# Altium PCB SetoDiff.PcbDoc
Units mm, origin at the board's own origin, x right, y up, seen from the top; angles counter-clockwise.
Board outline 40 x 53 mm, 2 copper layers (Top Layer, Bottom Layer); 42 components, 25 nets, 110 pads, 0 vias.
Unrouted connection lines stored in the file: 80.
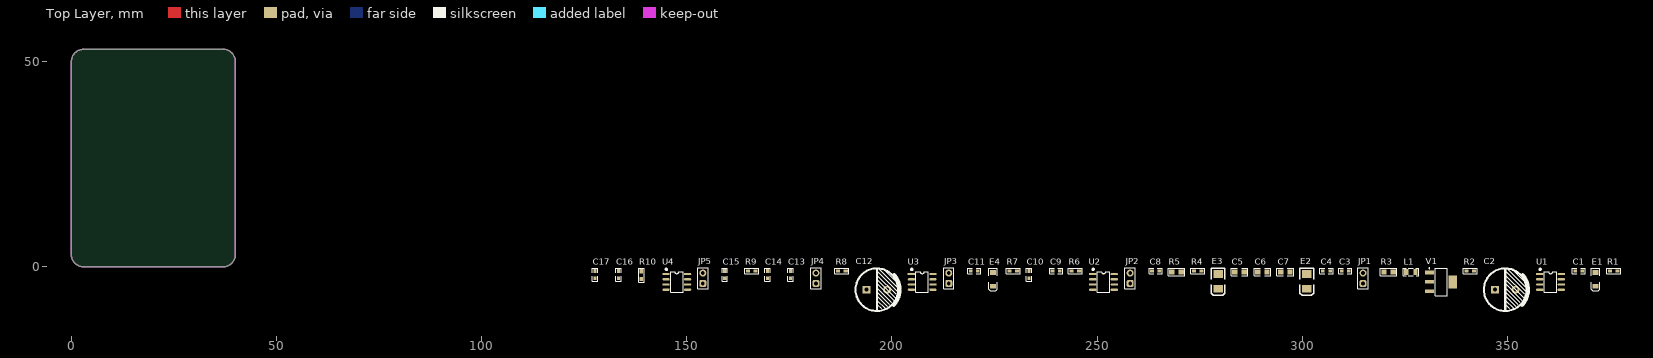
[diagram p0: Top Layer view]
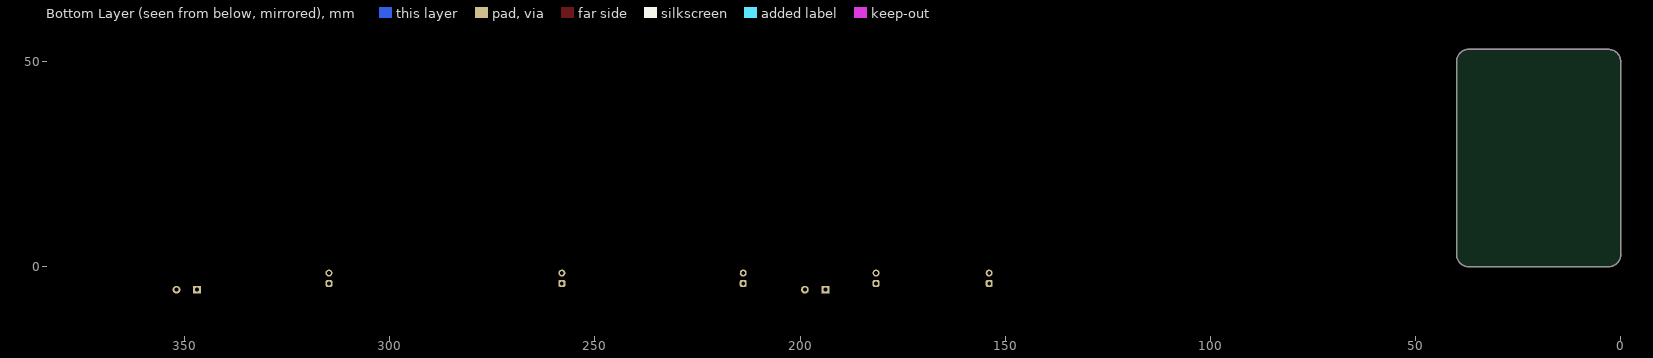
[diagram p1: Bottom Layer view, seen from below]

## Layer stack, top to bottom
Top Solder: solder mask 0.0102, Solder Resist, Dk 3.5
Top Layer: signal copper 0.0356
Dielectric 1: dielectric 0.32, FR-4, Dk 4.8
Bottom Layer: signal copper 0.0356
Bottom Solder: solder mask 0.0102, Solder Resist, Dk 3.5

## Board outline
0,3 0,50 cw(c3,50) 3,53 37,53 cw(c37,50) 40,50 40,3 cw(c37,3) 37,0 3,0 cw(c3,3)

## Design rules (kind name [scope] priority, off if disabled: settings)
Clearance [All] p1: gap=0.254 ignorepadtopadclearanceinfootprint=FALSE except(0: Arc-Hole Track-Hole SMDPad-Hole THPad-Hole Via-Hole Fill-Hole Poly-Hole Region-Hole Text-Hole)
PolygonConnect [All] p1: connectstyle=Relief reliefconductorwidth=0.254 reliefentries=4 polygonreliefangle="90 Angle" airgapwidth=0.254
RoomDefinition SetoDiff [InComponentClass('SetoDiff')] p1: confinementstyle=ConfineIn formatcopy=TRUE lockcomponents=FALSE outline 126.746,-11.176 377.952,-11.176 377.952,2.54 126.746,2.54
RoutingVias [All] p1: holewidth=0.711 width=1.27 viastyle="Through Hole" minholewidth=0.711 minwidth=1.27 maxholewidth=0.711 maxwidth=1.27
SolderMaskExpansion [All] p1: expansion=0.102
Width [All] p1: maxlimit=0.254 minlimit=0.254 preferedwidth=0.254
30 further rules are at their usual default settings.

## Components (designator, comment, footprint, x,y, rotation, side; value= is the part's Value field where it differs from the comment)
C1 "104" "C 0603" 367.411,-1.016 r0 top
C2 "100UF/50V BP" "CAP 5.0*10*12.5" 349.504,-5.588 r0 top
C3 "47p" "C 0603" 310.515,-1.016 r0 top
C4 "104" "C 0603" 305.943,-1.016 r0 top
C5 "104" "C 0805" 284.734,-1.27 r0 top
C6 "104" "C 0805" 290.322,-1.27 r0 top
C7 "104" "C 0805" 295.91,-1.27 r0 top
C8 "5.6p" "C 0603" 264.287,-1.016 r0 top
C9 "47p" "C 0603" 240.03,-1.016 r0 top
C10 "104" "C 0603" 233.426,-1.905 r90 top
C11 "104" "C 0603" 220.091,-1.016 r0 top
C12 "100UF/50V BP" "CAP 5.0*10*12.5" 196.342,-5.588 r0 top
C13 "47p" "C 0603" 175.26,-1.905 r90 top
C14 "104" "C 0603" 169.672,-1.905 r90 top
C15 "5.6p" "C 0603" 159.258,-1.905 r90 top
C16 "47p" "C 0603" 133.35,-1.905 r90 top
C17 "104" "C 0603" 127.635,-1.905 r90 top
E1 "4.7uF/25V" "CD A(3216)" 371.475,-3.048 r90 top
E2 "10uF/25V" "CD B(3528)" 301.117,-3.556 r90 top
E3 "10uF/10V" "CD B(3528)" 279.527,-3.556 r90 top
E4 "4.7uF/25V" "CD A(3216)" 224.663,-3.048 r90 top
JP1 "HDR-1X2" HDR-1X2 314.833,-4.064 r90 top
JP2 "HDR-1X2" HDR-1X2 258.064,-4.064 r90 top
JP3 "HDR-1X2" HDR-1X2 213.868,-4.064 r90 top
JP4 "HDR-1X2" HDR-1X2 181.483,-4.064 r90 top
JP5 "HDR-1X2" HDR-1X2 153.924,-4.064 r90 top
L1 "Bead" "L 0805" 326.517,-1.27 r0 top
R1 "10K" Res-SMD-0603 375.92,-1.016 r0 top
R2 "10K" Res-SMD-0603 340.995,-1.016 r0 top
R3 "2K" Res-SMD-0805 321.056,-1.27 r0 top
R4 "10K" Res-SMD-0603 274.574,-1.016 r0 top
R5 "2K" Res-SMD-0805 269.367,-1.27 r0 top
R6 "10K" Res-SMD-0603 244.729,-1.016 r0 top
R7 "10K" Res-SMD-0603 229.616,-1.016 r0 top
R8 "10K" Res-SMD-0603 187.833,-1.016 r0 top
R9 "10K" Res-SMD-0603 165.862,-1.016 r0 top
R10 "10K" Res-SMD-0603 138.938,-2.032 r90 top
U1 "NE5534" SOP8_N 360.553,-3.683 r0 top
U2 "NE5534" SOP8_N 251.587,-3.683 r0 top
U3 "NE5534" SOP8_N 207.391,-3.683 r0 top
U4 "NE5534" SOP8_N 147.574,-3.683 r0 top
V1 "AMS1117-12" SOT223_L 333.883,-3.683 r0 top

## Footprints (in the part's own frame and the unit in brackets; to place one, negate y for a bottom-side part, rotate by r counter-clockwise, add the part's x,y. Pads: shape width x height; smd on the part's side, far side on the other; paste and mask are expansions set on the pad)
"C 0603" [mil] "无极性贴片电容"
  rect 35x30 smd: 1(-35,0) 2(34,0)
  silkscreen extent -63,-26 62,26, body extent -31,-16 31,16, height 32
"C 0805" [mil] "无极性贴片电容"
  rect 50x50 smd: 1(-45,0) 2(45,0)
  silkscreen extent -81,-36 81,36, body extent -39,-24 39,24, height 20
"CAP 5.0*10*12.5" [mm] "脚距5mm直径10mm高度12.5mm"
  rect 1.9x1.9 hole 1: A(-2.5,0)
  round 1.9 hole 1: K(2.5,0)
  silkscreen extent -5.2,-5.2 5.64,5.2, body extent -5,-5.01 5.01,4.99, height 12.55
"CD A(3216)" [mm] "长3.2mm，宽1.6mm，厚1.6mm"
  rect 1.2x1.4 smd: A(-1.7,0) K(1.7,0)
  silkscreen extent -2.74,-1.02 2.67,1.02, body extent -1.6,-0.8 1.6,0.8, height 1.6
"CD B(3528)" [mil] "长3.5mm，宽2.8mm，厚1.9mm"
  rect 75x90 smd: A(-70.87,-0.01) K(70.86,-0.01)
  silkscreen extent -133,-65 127,65, body extent -69,-55 69,55, height 75
HDR-1X2 [mm] "排针，2脚"
  rrect50% 1.7x1.7 hole 0.9: 1(0,0)
  round 1.7 hole 0.9: 2(2.54,0)
  silkscreen extent -1.27,-1.27 3.81,1.27, body extent -1.27,-1.27 3.81,1.27, height 8.5
"L 0805" [mil] "小功率贴片电感"
  rect 40x55 smd: 1(-45,0) 2(45,0)
  silkscreen extent -75,-35 75,35, body extent -39,-24 39,24, height 35
Res-SMD-0603 [mil] "1/10W贴片电阻"
  rect 40x31.5 smd: 1(-36.5,0) 2(36.5,0)
  silkscreen extent -68,-26 68,26, body extent -31,-16 32,16, height 16
Res-SMD-0805 [mil] "1/8W贴片电阻"
  rect 50x50 smd: 1(-45,0) 2(45,0)
  silkscreen extent -81,-36 81,36, body extent -39,-25 39,25, height 20
SOP8_N [mm] "5*6*1.8mm（长宽高）"
  rect 1.8x0.55 smd: 1(-2.625,1.905)
  oval 1.8x0.55 smd: 2(-2.625,0.635) 3(-2.625,-0.635) 4(-2.625,-1.905) 5(2.625,-1.905) 6(2.625,-0.635) 7(2.625,0.635) 8(2.625,1.905)
  silkscreen extent -2.69,-2.5 1.52,3.2, body extent -3,-2.5 3,2.5, height 1.9
SOT223_L [mm] "SOT223, 4-Leads, Body 6.5x3.5mm, Pitch 2.3mm, Lead Span 7mm, IPC High Density"
  rect 2.1x0.9 smd: 1(-2.85,2.3) 2(-2.85,0) 3(-2.85,-2.3)
  rect 2.1x3.2 smd: 4(2.85,0)
  silkscreen extent -2.97,-3.35 1.5,3.42, body extent -1.85,-3.35 1.85,3.35, height 1.7

## Part data
C1 C3 C4 C5 C6 C7 C8 C9 C10 C11 C13 C14 C15 C16 C17: library part Cap-CER-SMD, "瓷片电容-贴片"
C2 C12: library part Cap-AE-RAD, "铝电解电容-直插"
E1 E2 E3 E4: library part Cap-TAN-SMD, "钽电解电容-贴片"
JP1 JP2 JP3 JP4 JP5: library part "Header 2", "2P接插件", BOM名称=2P接插件, 学习资源=www.ooocke.com, 版权归属=源创客
L1: library part Ind-Beads-SMD, "贴片电感-小功率"
R1 R2 R3 R4 R5 R6 R7 R8 R9 R10: library part Res-Fixed-SMD, "固定电阻器-贴片"
U1 U2 U3 U4: "双电源高精度运放", BOM名称=双电源高精度运放, 学习资源=www.ooocke.com, 版权归属=源创客
V1: library part AMS1117, "三端稳压芯片", BOM名称=稳压芯片, 学习资源=www.ooocke.com, 版权归属=源创客

## Nets (pads, with @x,y where several pads share a name; then routed paths per layer and width w, separated by ;. In a path a pad name is that pad's centre, name@x,y a point inside that pad or via, vN(x,y) a via of type N, cw(c..) or ccw(c..) an arc to the next point about the centre after c; other vN are vias at no path point)
+12: C1.1 C7.1 C11.1 E1.A E4.A R3.2 U1.7 U2.7 U3.7 U4.7 V1.2
GND: C1.2 C4.2 C5.2 C6.2 C7.2 C10.2 C11.2 C14.2 C17.2 E1.K E2.K E3.K E4.K JP1.1 JP3.1 JP3.2 JP4.1 R5.1 U1.4 U2.4 U3.4 U4.4 V1.1
L_in: C2.A JP1.2
NetC2_K: C2.K R2.1
NetC3_1: C3.1 U1.8
NetC3_2: C3.2 U1.5
NetC6_1: C6.1 E2.A L1.2 V1.3
NetC8_1: C8.1 JP2.1 R1.2 R6.1 U1.6
NetC8_2: C8.2 R4.1 R6.2 U2.2
NetC9_1: C9.1 U2.8
NetC9_2: C9.2 U2.5
NetC12_K: C12.K R8.1
NetC13_1: C13.1 U3.8
NetC13_2: C13.2 U3.5
NetC15_1: C15.1 JP5.1 R7.2 R10.1 U3.6
NetC15_2: C15.2 R9.1 R10.2 U4.2
NetC16_1: C16.1 U4.8
NetC16_2: C16.2 U4.5
NetJP2_2: JP2.2 R4.2 U2.6
NetJP5_2: JP5.2 R9.2 U4.6
NetR1_1: R1.1 R2.2 U1.2
NetR7_1: R7.1 R8.2 U3.2
R_in: C12.A JP4.2
Ref_6v: C4.1 C10.1 C14.1 C17.1 E3.A R3.1 R5.2 U1.3 U2.3 U3.3 U4.3
VCC: C5.1 L1.1
pads on no net: U1.1 U2.1 U3.1 U4.1 V1.4

## Keep-outs
Keep-Out Layer:
  the board outline again, w0.254

## Silkscreen, mask and mechanical layers (free items; w line width, h text height)
Mechanical 1:
  the board outline again, w0.254